# Altium PCB QI9-2604-A01_.PcbDoc (part 2 of 2)
Units mm, origin at the board's own origin, x right, y up, seen from the top; angles counter-clockwise.
Board outline 152.4 x 101.6 mm, 2 copper layers (Top Layer, Bottom Layer); 241 components, 189 nets, 865 pads, 74 vias.
Unrouted connection lines stored in the file: 153.
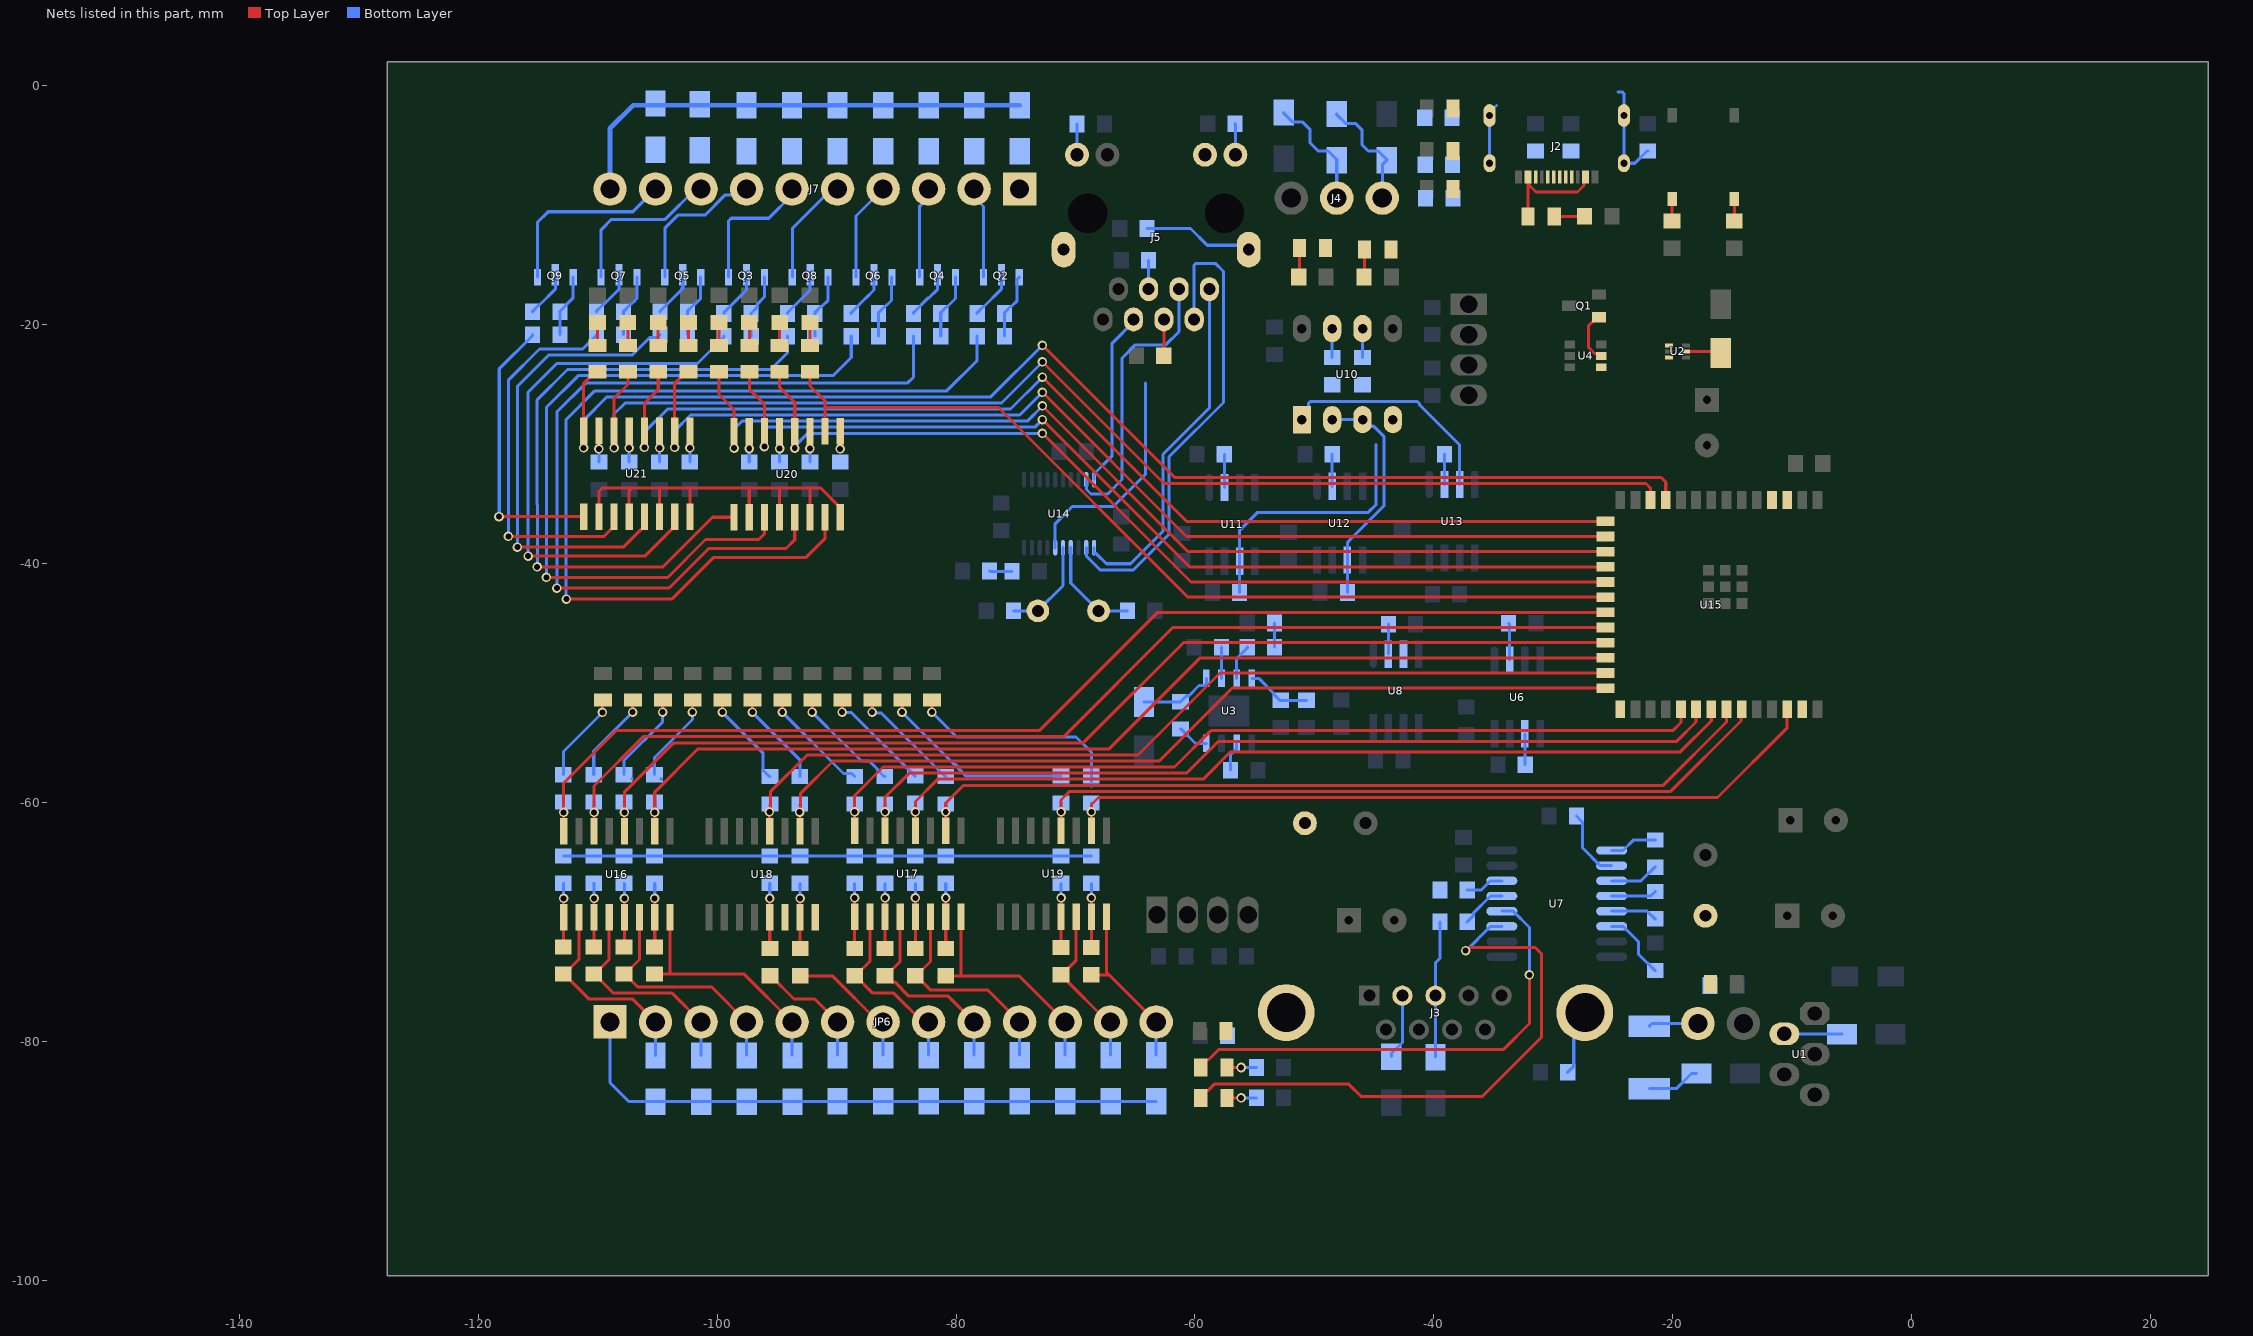
[diagram p2: the nets of this part, all layers, seen from the top]

## Via types
v1: diameter 0.8, hole 0.5, Top Layer to Bottom Layer, 74 vias

## Nets (pads, with @x,y where several pads share a name; then routed paths per layer and width w, separated by ;. In a path a pad name is that pad's centre, name@x,y a point inside that pad or via, vN(x,y) a via of type N, cw(c..) or ccw(c..) an arc to the next point about the centre after c; other vN are vias at no path point) (continued)
ICOM: D23.1 D24.1 D25.1 D26.1 D29.1 D30.1 D33.1 D34.1 D37.1 D38.1 D39.1 D40.1 JP6.1 RN1-1.2 RN1-2.2 RN1-3.2 RN1-4.2 RN1-5.2 RN1-6.2 RN2-1.2 RN2-2.2 RN2-3.2 RN2-4.2 RN2-5.2 RN2-6.2 | length 95.7
  Bottom Layer w0.254: RN1-1.2@-112.866,-64.464 RN1-2.2@-110.326,-64.464 RN1-3.2@-107.786,-64.464 RN1-4.2@-105.246,-64.464 RN1-5.2@-95.594,-64.464 RN1-6.2@-93.054,-64.464 RN2-1.2@-88.482,-64.464 RN2-2.2@-85.942,-64.464 RN2-3.2@-83.402,-64.464 -80.989,-64.464 RN2-5.2@-71.21,-64.464 RN2-6.2@-68.67,-64.464 ; JP6.1@-108.966,-78.359 -108.966,-83.439 -107.379,-85.026 D23.1@-105.156,-85.026 D25.1@-101.334,-85.026 D29.1@-97.513,-85.026 D33.1@-93.691,-85.026 -63.271,-85.026 D40.1@-63.246,-85.001
IN_00: R40.2 U15.21 U16.16 | length 98
  Top Layer w0.254: U16.16@-112.841,-62.388 v1(-112.841,-60.81) -112.841,-58.358 -108.458,-53.975 -73.025,-53.975 -63.119,-44.069 U15.21@-25.654,-44.069
  Bottom Layer w0.254: R40.2@-112.866,-59.949 -112.841,-59.974 v1(-112.841,-60.81)
IN_01: R42.2 U15.22 U16.14 | length 94.8
  Top Layer w0.254: U16.14@-110.301,-62.388 -110.301,-58.612 -106.172,-54.483 -70.993,-54.483 -61.849,-45.339 U15.22@-25.654,-45.339
  Bottom Layer w0.254: R42.2@-110.326,-59.949 -110.301,-59.974 v1(-110.301,-60.81)
IN_02: R44.2 U15.23 U16.12 | length 91.4
  Top Layer w0.254: U16.12@-107.761,-62.388 v1(-107.761,-60.81) -107.761,-59.12 -103.632,-54.991 -69.342,-54.991 -60.96,-46.609 U15.23@-25.654,-46.609
  Bottom Layer w0.254: R44.2@-107.786,-59.949 -107.761,-59.974 v1(-107.761,-60.81)
IN_03: R46.2 U15.24 U16.10 | length 88.4
  Top Layer w0.254: U16.10@-105.221,-62.388 v1(-105.221,-60.81) -105.221,-59.12 -101.6,-55.499 -67.183,-55.499 -59.563,-47.879 U15.24@-25.654,-47.879
  Bottom Layer w0.254: R46.2@-105.246,-59.949 -105.221,-59.974 v1(-105.221,-60.81)
IN_04: R48.2 U15.25 U18.12 | length 78
  Top Layer w0.254: U18.12@-95.594,-62.388 -95.594,-61.988 -95.608,-61.975 -95.608,-60.784 v1(-95.621,-60.77) -95.548,-60.697 -95.548,-59.099 -92.456,-56.007 -64.77,-56.007 -57.912,-49.149 U15.25@-25.654,-49.149
  Bottom Layer w0.254: v1(-95.621,-60.77) -95.569,-60.719 R48.2@-95.569,-60.106
IN_05: R50.2 U15.26 U18.10 | length 74.9
  Top Layer w0.254: U18.10@-93.054,-62.388 -93.054,-61.988 -93.072,-61.971 -93.072,-60.81 v1(-93.09,-60.793) -93.008,-60.711 -93.008,-59.226 -90.297,-56.515 -62.992,-56.515 -56.896,-50.419 U15.26@-25.654,-50.419
  Bottom Layer w0.254: v1(-93.09,-60.793) -93.08,-60.783 R50.2@-93.08,-60.106
IN_06: R41.2 U15.31 U17.16 | length 76.4
  Top Layer w0.254: U17.16@-88.482,-62.344 v1(-88.482,-60.766) -88.482,-59.399 -86.106,-57.023 -61.722,-57.023 -58.674,-53.975 -20.012,-53.975 -19.324,-53.287 U15.31@-19.324,-52.184
  Bottom Layer w0.254: v1(-88.482,-60.766) R41.2@-88.482,-60.106
IN_07: R43.2 U15.32 U17.14 | length 75
  Top Layer w0.254: U17.14@-85.942,-62.344 v1(-85.942,-60.766) -85.942,-59.556 -83.918,-57.531 -60.706,-57.531 -58.039,-54.864 -19.671,-54.864 -18.054,-53.247 U15.32@-18.054,-52.184
  Bottom Layer w0.254: R43.2@-85.968,-60.106 -85.942,-60.132 v1(-85.942,-60.766)
IN_08: R45.2 U15.33 U17.12 | length 73.6
  Top Layer w0.254: U17.12@-83.402,-62.344 v1(-83.402,-60.766) -83.402,-59.907 -81.534,-58.039 -59.309,-58.039 -57.023,-55.753 -19.372,-55.753 -16.785,-53.166 -16.785,-52.185 U15.33@-16.784,-52.184
  Bottom Layer w0.254: v1(-83.402,-60.766) R45.2@-83.402,-60.042
IN_09: R47.2 U15.34 U17.10 | length 72.2
  Top Layer w0.254: U17.10@-80.862,-62.344 v1(-80.862,-60.766) -80.862,-60.034 -79.375,-58.547 -20.814,-58.547 -15.514,-53.247 U15.34@-15.514,-52.184
  Bottom Layer w0.254: v1(-80.862,-60.766) R47.2@-80.862,-60.106
IN_10: R49.2 U15.35 U19.12 | length 63.9
  Top Layer w0.254: U19.12@-71.21,-62.344 v1(-71.21,-60.766) -71.21,-59.78 -70.485,-59.055 -20.187,-59.055 -14.297,-53.166 -14.297,-52.237 U15.35@-14.244,-52.184
  Bottom Layer w0.254: v1(-71.21,-60.766) R49.2@-71.21,-60.042
IN_11: R51.2 U15.38 U19.10 | length 65.4
  Top Layer w0.254: U19.10@-68.67,-62.344 v1(-68.67,-60.766) -68.67,-60.161 -68.072,-59.563 -16.256,-59.563 -10.434,-53.741 U15.38@-10.434,-52.184
  Bottom Layer w0.254: v1(-68.67,-60.766) R51.2@-68.67,-60.042
INPUT00: D23.2 JP6.2 RN3-1.1 U16.2 | length 17.5
  Top Layer w0.254: RN3-1.1@-112.866,-74.358 RN3-1.1@-112.803,-74.358 ; U16.2@-111.571,-69.588 -111.571,-73.126 RN3-1.1@-112.803,-74.358 ; JP6.2@-105.156,-78.359 -107.061,-76.454 -110.707,-76.454 RN3-1.1@-112.803,-74.358
  Bottom Layer w0.254: D23.2@-105.156,-81.166 JP6.2@-105.156,-78.359
INPUT01: D25.2 JP6.3 RN3-2.1 U16.4 | length 18.6
  Top Layer w0.254: U16.4@-109.031,-69.588 -109.031,-73.126 -110.263,-74.358 -108.675,-75.946 -103.759,-75.946 JP6.3@-101.346,-78.359
  Bottom Layer w0.254: D25.2@-101.346,-81.154 JP6.3@-101.346,-78.359
INPUT02: D29.2 JP6.4 RN3-3.1 U16.6 U18.6 | length 19.9
  Top Layer w0.254: U16.6@-106.491,-69.588 -106.491,-73.126 -107.723,-74.358 -106.856,-75.225 -106.853,-75.225 -106.64,-75.438 -100.457,-75.438 JP6.4@-97.536,-78.359
  Bottom Layer w0.254: D29.2@-97.536,-81.143 JP6.4@-97.536,-78.359
INPUT03: D33.2 JP6.5 RN3-4.1 U16.8 U18.8 | length 20.8
  Top Layer w0.254: RN3-4.1@-105.246,-74.358 -104.076,-74.358 ; U16.8@-103.951,-69.588 -103.951,-74.233 -104.076,-74.358 ; JP6.5@-93.726,-78.359 -97.727,-74.358 -103.951,-74.358 -104.076,-74.358
  Bottom Layer w0.254: D33.2@-93.726,-81.131 JP6.5@-93.726,-78.359
INPUT04: D37.2 JP6.6 RN3-5.1 | length 10
  Top Layer w0.254: RN3-5.1@-95.569,-74.497 -95.506,-74.497 -93.564,-76.439 -91.836,-76.439 JP6.6@-89.916,-78.359
  Bottom Layer w0.254: D37.2@-89.916,-81.14 JP6.6@-89.916,-78.359
INPUT05: D39.2 JP6.7 RN3-6.1 | length 11.3
  Top Layer w0.254: RN3-6.1@-93.029,-74.497 -90.355,-74.497 -86.493,-78.359 JP6.7@-86.106,-78.359
  Bottom Layer w0.254: D39.2@-86.106,-81.14 JP6.7@-86.106,-78.359
INPUT06: D24.2 JP6.8 RN4-1.1 U17.2 | length 16
  Top Layer w0.254: RN4-1.1@-88.482,-74.497 RN4-1.1@-88.419,-74.497 ; U17.2@-87.212,-69.544 -87.212,-73.291 RN4-1.1@-88.419,-74.497 ; JP6.8@-82.296,-78.359 -82.799,-78.359 -85.212,-75.946 -86.97,-75.946 RN4-1.1@-88.419,-74.497
  Bottom Layer w0.254: D24.2@-82.296,-81.14 JP6.8@-82.296,-78.359
INPUT07: D26.2 JP6.9 RN4-2.1 U17.4 | length 17.4
  Top Layer w0.254: U17.4@-84.672,-69.544 -84.672,-73.291 -85.879,-74.497 RN4-2.1@-85.942,-74.497 -85.434,-75.005 -85.142,-75.005 -83.947,-76.2 -80.645,-76.2 JP6.9@-78.486,-78.359
  Bottom Layer w0.254: D26.2@-78.486,-81.14 JP6.9@-78.486,-78.359
INPUT08: D30.2 JP6.10 RN4-3.1 U17.6 | length 18.6
  Top Layer w0.254: RN4-3.1@-83.402,-74.497 RN4-3.1@-83.339,-74.497 ; U17.6@-82.132,-69.544 -82.132,-73.291 RN4-3.1@-83.339,-74.497 ; JP6.10@-74.676,-78.359 -77.365,-75.67 -82.166,-75.67 RN4-3.1@-83.339,-74.497
  Bottom Layer w0.254: D30.2@-74.676,-81.14 JP6.10@-74.676,-78.359
INPUT09: D34.2 JP6.11 RN4-4.1 U17.8 | length 19.3
  Top Layer w0.254: RN4-4.1@-80.799,-74.497 -79.629,-74.497 ; U17.8@-79.592,-69.544 -79.592,-74.461 -79.629,-74.497 ; JP6.11@-70.866,-78.359 -74.728,-74.497 -79.629,-74.497
  Bottom Layer w0.254: D34.2@-70.866,-81.14 JP6.11@-70.866,-78.359
INPUT10: D38.2 JP6.12 RN4-5.1 U19.6 | length 13.9
  Top Layer w0.254: RN4-5.1@-71.21,-74.411 -71.147,-74.411 -69.94,-73.205 U19.6@-69.94,-69.544 ; RN4-5.1@-71.147,-74.497 JP6.12@-67.285,-78.359
  Bottom Layer w0.254: JP6.12@-67.285,-78.359 JP6.12@-67.056,-78.359 D38.2@-67.056,-81.14
INPUT11: D40.2 JP6.13 RN4-6.1 U19.8 | length 14.8
  Top Layer w0.254: RN4-6.1@-68.67,-74.411 -67.194,-74.411 ; U19.8@-67.4,-69.544 -67.4,-74.205 -67.194,-74.411 ; JP6.13@-63.246,-78.359 -67.194,-74.411
  Bottom Layer w0.254: D40.2@-63.246,-81.14 JP6.13@-63.246,-78.359
LINK/RESET: J5.10 U14.6 | length 18.9
  Bottom Layer w0.254: U14.6@-71.699,-38.664 -71.699,-36.647 -70.263,-35.211 -66.834,-35.211 -64.135,-32.512 -64.135,-24.892
NetC3_1: C3.1 U3.8 | length 2.7
  Bottom Layer w0.254: C3.1@-61.214,-53.848 -61.151,-53.848 -59.95,-55.048 U3.8@-59.055,-55.048
NetC3_2: C3.2 D9.2 L2.1 U3.1 | length 6.3
  Bottom Layer w0.254: D9.2@-64.262,-51.562 C3.2@-61.214,-51.562 -60.706,-51.054 -60.509,-51.054 -59.658,-50.203 -59.207,-50.203 -59.055,-50.051 U3.1@-59.055,-49.6
NetC5_1: C5.1 U3.3 | length 3
  Bottom Layer w0.254: U3.3@-56.515,-49.6 -56.515,-47.942 -55.626,-47.053 C5.1@-55.626,-46.99
NetC5_2: C5.2 R11.2 | length 2
  Bottom Layer w0.254: C5.2@-53.34,-46.99 R11.2@-53.34,-44.958
NetC7_2: C7.2 J2.SH1 J2.SH2 J2.SH3 J2.SH4 | length 13.9
  Bottom Layer w0.254: J2.SH2@-35.338,-6.481 J2.SH4@-35.338,-2.481 -35.338,-2.233 -34.756,-1.651 ; -24.608,-0.508 -24.247,-0.508 -24.098,-0.657 J2.SH3@-24.098,-2.481 J2.SH1@-24.098,-6.481 -23.182,-6.481 -22.162,-5.461 C7.2@-22.098,-5.461
NetC11_1: C11.1 J3.10 J3.11 | length 5.6
  Bottom Layer w0.254: C11.1@-28.803,-82.572 -28.295,-82.064 -28.295,-79.717 -27.371,-78.793 J3.10@-27.371,-77.574
NetC12_1: C12.1 U7.3 | length 4.1
  Bottom Layer w0.254: U7.3@-25.118,-66.548 -22.669,-66.548 -21.526,-65.405 C12.1@-21.463,-65.405
NetC12_2: C12.2 U7.1 | length 4
  Bottom Layer w0.254: U7.1@-25.118,-64.008 -24.168,-64.008 -23.279,-63.119 C12.2@-21.463,-63.119
NetC13_1: C13.1 U7.4 | length 3.8
  Bottom Layer w0.254: U7.4@-25.118,-67.818 -21.844,-67.818 C13.1@-21.463,-67.437
NetC13_2: C13.2 U7.5 | length 3.9
  Bottom Layer w0.254: U7.5@-25.118,-69.088 -22.162,-69.088 -21.526,-69.723 C13.2@-21.463,-69.723
NetC15_1: C15.1 U7.2 | length 5.9
  Bottom Layer w0.254: C15.1@-28.07,-61.124 -27.562,-61.632 -27.562,-63.784 -26.068,-65.278 U7.2@-25.118,-65.278
NetC16_2: C16.2 U7.6 | length 5.8
  Bottom Layer w0.254: U7.6@-25.118,-70.358 -24.168,-70.358 -22.86,-71.666 -22.86,-72.707 -21.526,-74.041 C16.2@-21.463,-74.041
NetC26_2: C26.2 R32.2 | length 1.9
  Bottom Layer w0.254: C26.2@-77.186,-40.619 -77.165,-40.64 R32.2@-75.311,-40.64
NetC27_2: C27.2 J5.4 | length 3.1
  Top Layer w0.254: C27.2@-62.611,-22.606 -62.606,-22.601 J5.4@-62.606,-19.558
NetC28_2: C28.2 J5.5 | length 2.4
  Bottom Layer w0.254: C28.2@-63.881,-14.605 -63.876,-14.61 J5.5@-63.876,-17.018
NetC30_2: C30.2 J5.13 J5.14 | length 9.2
  Bottom Layer w0.254: C30.2@-64.008,-11.938 -60.377,-11.938 -58.97,-13.345 -55.874,-13.345 J5.13@-55.501,-13.718
NetD1_1: D1.1 F1.2 | length 4.5
  Bottom Layer w0.254: F1.2@-21.971,-83.947 -19.704,-83.947 -18.434,-82.677 D1.1@-18.034,-82.677
NetD2_2: D2.2 R1.2
NetD3_2: D3.2 R2.2
NetD4_2: D4.2 R3.2 | length 2.7
  Top Layer w0.254: D4.2@-30.058,-10.922 R3.2@-27.391,-10.922
NetD6_2: D6.2 L1.1 U1.2 | length 4.8
  Bottom Layer w0.254: U1.2@-10.668,-79.355 -5.862,-79.355 D6.2@-5.842,-79.375
NetD8_2: D8.2 R7.2
NetD10_1: D10.1 R14.1 | length 2.5
  Top Layer w0.254: D10.1@-57.32,-82.169 v1(-56.134,-82.169)
  Bottom Layer w0.254: v1(-56.134,-82.169) R14.1@-54.864,-82.169
NetD11_1: D11.1 R15.1 | length 2.5
  Top Layer w0.254: D11.1@-57.32,-84.709 v1(-56.134,-84.709)
  Bottom Layer w0.254: v1(-56.134,-84.709) R15.1@-54.864,-84.709
NetD12_1: D12.1 J3.2 R18.1 | length 5.5
  Bottom Layer w0.254: D12.1@-43.561,-81.255 -43.561,-81.001 -42.636,-80.076 J3.2@-42.636,-76.154
NetD13_1: D13.1 J3.3 R19.1 | length 11.5
  Bottom Layer w0.254: D13.1@-39.866,-81.299 -39.866,-73.404 -39.497,-73.035 R19.1@-39.497,-69.977
NetD14_1: D14.1 R22.1 | length 2.4
  Top Layer w0.254: R22.1@-51.308,-16.002 -51.265,-15.959 D14.1@-51.265,-13.589
NetD15_1: D15.1 R23.1 | length 2.3
  Top Layer w0.254: R23.1@-45.847,-16.002 -45.804,-15.959 D15.1@-45.804,-13.716
NetD16_2: D16.2 D17.1 J4.1 R24.1 | length 9.9
  Bottom Layer w0.254: D17.1@-48.133,-2.362 -48.133,-2.413 -47.409,-3.137 -46.578,-3.137 -46.038,-3.678 -46.038,-4.908 -45.497,-5.448 -44.666,-5.448 -43.942,-6.172 D16.2@-43.942,-6.223 -44.323,-6.604 J4.1@-44.323,-9.398
NetD17_2: D17.2 D18.1 J4.2 R25.1 | length 10
  Bottom Layer w0.254: D18.1@-52.578,-2.235 -52.578,-2.286 -51.854,-3.01 -51.023,-3.01 -50.356,-3.678 -50.356,-4.781 -49.688,-5.448 -48.857,-5.448 -48.133,-6.172 D17.2@-48.133,-6.223 J4.2@-48.133,-9.398
NetD19_2: D19.2 R38.1
NetD20_2: D20.2 R39.1
NetD21_2: D21.2 R40.1 | length 7.6
  Top Layer w0.254: v1(-109.601,-52.451) -109.601,-51.438 D21.2@-109.557,-51.395
  Bottom Layer w0.254: R40.1@-112.866,-57.663 -112.866,-55.716 v1(-109.601,-52.451)
NetD22_2: D22.2 R41.1 | length 9.3
  Top Layer w0.254: v1(-94.547,-52.429) -94.547,-51.416 D22.2@-94.525,-51.395
  Bottom Layer w0.254: v1(-94.547,-52.429) -89.413,-57.563 -88.74,-57.563 R41.1@-88.482,-57.82
NetD27_2: D27.2 R42.1 | length 8.6
  Top Layer w0.254: v1(-107.074,-52.429) D27.2@-107.074,-51.416 ; v1@-107.052,-52.429 D27.2@-107.052,-51.395
  Bottom Layer w0.254: R42.1@-110.326,-57.663 -110.326,-55.682 v1(-107.074,-52.429)
NetD28_2: D28.2 R43.1 | length 10.4
  Top Layer w0.254: v1(-92.042,-52.429) D28.2@-92.042,-51.416 ; v1@-92.02,-52.429 D28.2@-92.02,-51.395
  Bottom Layer w0.254: v1(-92.042,-52.429) -89.511,-54.96 -89.471,-54.96 -87.916,-56.515 -87.273,-56.515 -86.539,-57.249 -86.539,-57.312 -86.031,-57.82 R43.1@-85.968,-57.82
NetD31_2: D31.2 R46.1 | length 8.7
  Top Layer w0.254: v1(-102.063,-52.429) D31.2@-102.063,-51.416 ; v1@-102.041,-52.429 D31.2@-102.041,-51.395
  Bottom Layer w0.254: R46.1@-105.246,-57.663 -105.246,-56.224 -102.063,-53.041 v1(-102.063,-52.429) ; R46.1@-104.675,-58.044 R46.1@-104.675,-57.98
NetD32_2: D32.2 R45.1 | length 10.4
  Top Layer w0.254: v1(-89.536,-52.429) D32.2@-89.536,-51.416 ; v1@-89.514,-52.429 D32.2@-89.514,-51.395
  Bottom Layer w0.254: v1(-89.536,-52.429) -89.499,-52.466 -88.755,-52.466 -83.466,-57.756 R45.1@-83.402,-57.756
NetD35_2: D35.2 R44.1 | length 8.7
  Top Layer w0.254: v1(-104.568,-52.429) D35.2@-104.568,-51.416 ; v1@-104.547,-52.429 D35.2@-104.547,-51.395
  Bottom Layer w0.254: R44.1@-107.786,-57.663 -107.786,-56.478 -104.568,-53.26 v1(-104.568,-52.429) ; R44.1@-107.124,-58.039 R44.1@-107.124,-57.975
NetD36_2: D36.2 R47.1 | length 10.5
  Top Layer w0.254: v1(-87.031,-52.429) D36.2@-87.031,-51.416 ; v1@-87.009,-52.481 D36.2@-87.009,-51.395
  Bottom Layer w0.254: v1(-87.031,-52.429) -86.964,-52.497 -86.25,-52.497 -80.926,-57.82 R47.1@-80.862,-57.82
NetD41_2: D41.2 R48.1 | length 9.1
  Top Layer w0.254: v1(-99.558,-52.429) D41.2@-99.558,-51.416 ; v1@-99.536,-52.429 D41.2@-99.536,-51.395
  Bottom Layer w0.254: v1@-99.558,-52.441 -96.141,-55.858 -96.141,-57.312 -95.633,-57.82 R48.1@-95.569,-57.82
NetD42_2: D42.2 R49.1 | length 17.7
  Top Layer w0.254: v1(-84.526,-52.429) D42.2@-84.526,-51.416 ; v1@-84.504,-52.429 D42.2@-84.504,-51.395
  Bottom Layer w0.254: v1(-84.526,-52.429) -80.15,-56.804 -80.006,-56.804 -79.783,-57.028 -79.783,-57.172 -79.17,-57.785 R49.1@-71.21,-57.785
NetD43_2: D43.2 R50.1 | length 8.1
  Top Layer w0.254: v1(-97.052,-52.429) -97.052,-51.416 D43.2@-97.031,-51.395
  Bottom Layer w0.254: v1(-97.052,-52.429) -93.08,-56.402 R50.1@-93.08,-57.82
NetD44_2: D44.2 R51.1 | length 19.6
  Top Layer w0.254: v1(-82.02,-52.429) D44.2@-82.02,-51.416 ; v1@-81.998,-52.429 D44.2@-81.998,-51.395
  Bottom Layer w0.254: v1(-82.02,-52.429) -79.942,-54.507 -69.953,-54.507 -68.67,-55.79 R51.1@-68.67,-57.756 -68.67,-58.645
NetD45_1: D45.1 RN5-4.1 | length 1.9
  Top Layer w0.254: D45.1@-92.226,-21.729 -92.224,-21.727 RN5-4.1@-92.224,-19.813
NetD46_1: D46.1 RN5-3.1 | length 1.9
  Top Layer w0.254: D46.1@-94.766,-21.729 D46.1@-94.766,-21.729 RN5-3.1@-94.765,-19.813
NetD47_1: D47.1 RN5-2.1 | length 1.9
  Top Layer w0.254: D47.1@-97.306,-21.729 RN5-2.1@-97.306,-19.813
NetD50_1: D50.1 RN5-1.1 | length 1.9
  Top Layer w0.254: D50.1@-99.847,-21.729 RN5-1.1@-99.847,-19.813
NetD54_1: D54.1 RN8-4.1 | length 1.9
  Top Layer w0.254: RN8-4.1@-102.388,-19.813 -102.388,-21.728 D54.1@-102.386,-21.729
NetD56_1: D56.1 RN8-3.1 | length 1.9
  Top Layer w0.254: RN8-3.1@-104.929,-19.813 -104.929,-21.727 D56.1@-104.926,-21.729
NetD58_1: D58.1 RN8-2.1 | length 1.9
  Top Layer w0.254: RN8-2.1@-107.47,-19.813 -107.47,-21.726 D58.1@-107.466,-21.729
NetD61_1: D61.1 RN8-1.1 | length 1.9
  Top Layer w0.254: RN8-1.1@-110.011,-19.813 -110.011,-21.725 D61.1@-110.006,-21.729
NetF1_1: F1.1 J1.1 | length 4.2
  Bottom Layer w0.254: F1.1@-21.971,-78.717 -21.74,-78.486 J1.1@-17.907,-78.486
NetJ2_A5: J2.A5 R5.1
NetJ2_B5: J2.B5 R4.1
NetJ5_9: J5.9 R35.1 | length 2.6
  Bottom Layer w0.254: R35.1@-56.642,-3.175 -56.621,-3.196 J5.9@-56.621,-5.768
NetJ5_12: J5.12 R34.1 | length 2.6
  Bottom Layer w0.254: R34.1@-69.873,-3.2 -69.871,-3.203 J5.12@-69.871,-5.768
NetQ1_1: Q1.1 U4.5 | length 4.4
  Top Layer w0.254: Q1.1@-26.182,-19.365 -26.357,-19.365 -27.051,-20.059 -27.051,-21.903 -26.551,-22.403 -26.194,-22.403 U4.5@-25.991,-22.606
NetQ2_1: Q2.1 R52.2 R54.2 | length 5.5
  Bottom Layer w0.254: R52.2@-75.946,-20.955 -75.946,-18.986 -75.438,-18.479 -75.375,-18.479 -74.879,-17.983 -74.879,-16.187 Q2.1@-74.706,-16.014
NetQ3_1: Q3.1 R53.2 R55.2 | length 5.4
  Bottom Layer w0.254: R53.2@-97.136,-20.955 -97.155,-20.936 R55.2@-97.155,-19.05 -96.647,-18.542 -96.647,-18.288 -96.042,-17.683 Q3.1@-96.042,-16.014
NetQ4_1: Q4.1 R56.2 R58.2 | length 5.5
  Bottom Layer w0.254: R56.2@-81.28,-20.955 -81.28,-18.986 -80.772,-18.479 -80.709,-18.479 -80.04,-17.81 Q4.1@-80.04,-16.014
NetQ5_1: Q5.1 R57.2 R59.2 | length 5.3
  Bottom Layer w0.254: R57.2@-102.489,-20.828 -102.489,-18.86 -101.981,-18.351 -101.917,-18.351 -101.376,-17.81 Q5.1@-101.376,-16.014
NetQ6_1: Q6.1 R60.2 R62.2 | length 5.4
  Bottom Layer w0.254: R60.2@-86.487,-20.955 -86.487,-18.986 -85.979,-18.479 -85.916,-18.479 -85.4,-17.963 -85.4,-16.04 Q6.1@-85.374,-16.014
NetQ7_1: Q7.1 R61.2 R63.2 | length 5.3
  Bottom Layer w0.254: R61.2@-107.823,-20.828 R63.2@-107.823,-18.923 -107.823,-18.86 -107.315,-18.351 -107.252,-18.351 -106.71,-17.81 Q7.1@-106.71,-16.014
NetQ8_1: Q8.1 R64.2 R66.2 | length 5.4
  Bottom Layer w0.254: R64.2@-91.821,-20.955 -91.821,-18.986 -91.313,-18.479 -91.25,-18.479 -90.708,-17.937 Q8.1@-90.708,-16.014
NetQ9_1: Q9.1 R65.2 R67.2 | length 5.3
  Bottom Layer w0.254: R65.2@-113.157,-20.828 R67.2@-113.157,-18.923 -113.157,-18.86 -112.044,-17.747 Q9.1@-112.044,-16.014
NetR6_1: R6.1 U3.2 | length 2.6
  Bottom Layer w0.254: U3.2@-57.785,-49.6 R6.1@-57.785,-46.99
NetR7_1: R7.1 U4.4
NetR10_1: R10.1 U3.6 | length 2.4
  Bottom Layer w0.254: R10.1@-57.023,-57.277 -57.023,-56.007 -56.515,-55.499 U3.6@-56.515,-55.048
NetR12_1: R12.1 R13.2 U3.4 | length 5.4
  Bottom Layer w0.254: U3.4@-55.245,-49.6 -54.667,-49.6 -53.404,-50.863 -53.404,-50.927 -52.896,-51.435 R13.2@-52.832,-51.435 R12.1@-50.673,-51.435
NetR17_1: R17.1 U6.2 | length 3.1
  Bottom Layer w0.254: R17.1@-33.747,-44.997 -33.656,-45.089 U6.2@-33.656,-48.079
NetR18_2: R18.2 U7.14 | length 3.2
  Bottom Layer w0.254: R18.2@-37.211,-67.31 -36.03,-67.31 -35.268,-66.548 U7.14@-34.318,-66.548
NetR19_2: R19.2 U7.13 | length 3.9
  Bottom Layer w0.254: R19.2@-37.211,-69.977 -36.703,-69.469 -36.703,-69.253 -35.268,-67.818 U7.13@-34.318,-67.818
NetR21_2: R21.2 U8.2 | length 2.5
  Bottom Layer w0.254: U8.2@-43.815,-47.571 R21.2@-43.815,-45.064
NetR24_2: R24.2 U10.7 | length 2.4
  Bottom Layer w0.254: R24.2@-48.514,-22.733 U10.7@-48.514,-20.32
NetR25_2: R25.2 U10.6 | length 2.4
  Bottom Layer w0.254: R25.2@-45.974,-22.733 U10.6@-45.974,-20.32
NetR29_1: R29.1 U11.2 | length 2.8
  Bottom Layer w0.254: R29.1@-57.547,-30.849 -57.531,-30.865 U11.2@-57.531,-33.621
NetR30_1: R30.1 U12.2 | length 2.7
  Bottom Layer w0.254: U12.2@-48.514,-33.525 R30.1@-48.514,-30.836
NetR31_2: R31.2 U13.2 | length 2.5
  Bottom Layer w0.254: U13.2@-39.116,-33.367 -39.116,-30.844 R31.2@-39.107,-30.836
NetR36_1: R36.1 SW1.2 U15.27 | length 1.7
  Top Layer w0.254: R36.1@-20.066,-11.176 SW1.2@-20.066,-9.469
NetR37_1: R37.1 SW2.1 U15.3 | length 1.8
  Top Layer w0.254: R37.1@-14.859,-11.303 SW2.1@-14.859,-9.469
NetR38_2: R38.2 U15.4
NetR39_2: R39.2 U15.39
NetR52_1: R52.1 U20.15 | length 79.1
  Top Layer w0.254: v1(-112.625,-42.971) -103.804,-42.971 -100.33,-39.497 -92.583,-39.497 -90.96,-37.874 U20.15@-90.96,-36.112
  Bottom Layer w0.254: v1(-112.625,-42.971) -112.633,-42.964 -112.633,-27.924 -110.236,-25.527 -80.772,-25.527 -78.232,-22.987 R52.1@-78.232,-20.955
NetR53_1: R53.1 U21.15 | length 46.2
  Top Layer w0.254: v1(-115.824,-39.37) -106.054,-39.37 -103.548,-36.864 U21.15@-103.548,-36.064
  Bottom Layer w0.254: v1(-115.824,-39.37) -115.824,-25.654 -113.411,-23.241 -101.645,-23.241 -99.422,-21.019 R53.1@-99.422,-20.955
NetR56_1: R56.1 U20.13 | length 72.7
  Top Layer w0.254: v1(-113.414,-42.037) -104.013,-42.037 -100.711,-38.735 -94.234,-38.735 -93.5,-38.001 U20.13@-93.5,-36.112
  Bottom Layer w0.254: v1(-113.414,-42.037) -113.411,-42.034 -113.411,-27.305 -110.998,-24.892 -84.074,-24.892 -83.566,-24.384 R56.1@-83.566,-20.955
NetR57_1: R57.1 U21.13 | length 39.3
  Top Layer w0.254: v1(-116.713,-38.608) -116.694,-38.589 -107.813,-38.589 -106.088,-36.864 U21.13@-106.088,-36.064
  Bottom Layer w0.254: v1(-116.713,-38.608) -116.694,-38.589 -116.694,-25.127 -114.109,-22.543 -107.124,-22.543 -105.642,-21.06 -105.007,-21.06 R57.1@-104.775,-20.828
NetR60_1: R60.1 U20.11 | length 64.4
  Top Layer w0.254: v1(-114.3,-41.148) -104.14,-41.148 -100.965,-37.973 -96.52,-37.973 -96.04,-37.493 U20.11@-96.04,-36.112
  Bottom Layer w0.254: v1(-114.3,-41.148) -114.281,-41.129 -114.281,-34.055 -114.3,-34.036 -114.3,-26.924 -111.633,-24.257 -90.297,-24.257 -88.773,-22.733 R60.1@-88.773,-20.955
NetR61_1: R61.1 U21.11 | length 32.1
  Top Layer w0.254: v1(-117.475,-37.719) -109.483,-37.719 -108.628,-36.864 U21.11@-108.628,-36.064
  Bottom Layer w0.254: v1(-117.475,-37.719) -117.475,-24.638 -114.871,-22.034 -111.252,-22.034 -110.109,-20.892 R61.1@-110.109,-20.828
NetR64_1: R64.1 U20.9 | length 56.2
  Top Layer w0.254: v1(-115.062,-40.259) -104.534,-40.259 -100.387,-36.112 U20.9@-98.58,-36.112
  Bottom Layer w0.254: v1(-115.062,-40.259) -115.043,-40.24 -115.043,-35.071 -115.062,-35.052 -115.062,-26.289 -112.522,-23.749 -95.504,-23.749 -94.107,-22.352 R64.1@-94.107,-20.955
NetR65_1: R65.1 U21.9 | length 23.5
  Top Layer w0.254: v1(-118.256,-36.068) -115.189,-36.068 -115.185,-36.064 U21.9@-111.168,-36.064
  Bottom Layer w0.254: v1(-118.256,-36.068) -118.237,-36.049 -118.237,-23.685 -115.443,-20.892 R65.1@-115.443,-20.828
NetRN1-1_1: RN1-1.1 RN3-1.2 U16.1 | length 5.3
  Top Layer w0.254: RN3-1.2@-112.866,-72.072 -112.841,-72.046 U16.1@-112.841,-69.588 v1(-112.841,-68.01)
  Bottom Layer w0.254: RN1-1.1@-112.866,-66.75 -112.841,-66.776 v1(-112.841,-68.01)
NetRN1-2_1: RN1-2.1 RN3-2.2 U16.3 | length 5.3
  Top Layer w0.254: RN3-2.2@-110.326,-72.072 -110.301,-72.046 U16.3@-110.301,-69.588 v1(-110.301,-68.01)
  Bottom Layer w0.254: RN1-2.1@-110.326,-66.75 -110.301,-66.776 v1(-110.301,-68.01)
NetRN1-3_1: RN1-3.1 RN3-3.2 U16.5 | length 5.3
  Top Layer w0.254: RN3-3.2@-107.786,-72.072 -107.761,-72.046 U16.5@-107.761,-69.588 v1(-107.761,-68.01)
  Bottom Layer w0.254: RN1-3.1@-107.786,-66.75 -107.761,-66.776 v1(-107.761,-68.01)
NetRN1-4_1: RN1-4.1 RN3-4.2 U16.7 | length 5.3
  Top Layer w0.254: RN3-4.2@-105.246,-72.072 -105.221,-72.046 U16.7@-105.221,-69.588 v1(-105.221,-68.01)
  Bottom Layer w0.254: RN1-4.1@-105.246,-66.75 -105.221,-66.776 v1(-105.221,-68.01)
NetRN1-5_1: RN1-5.1 RN3-5.2 U18.5 | length 5.5
  Top Layer w0.254: v1(-95.594,-68.01) U18.5@-95.594,-69.588 -95.594,-72.186 RN3-5.2@-95.569,-72.211
  Bottom Layer w0.254: v1(-95.594,-68.01) RN1-5.1@-95.594,-66.75
NetRN1-6_1: RN1-6.1 RN3-6.2 U18.7 | length 5.5
  Top Layer w0.254: v1(-93.054,-68.01) U18.7@-93.054,-69.588 -93.054,-72.186 RN3-6.2@-93.029,-72.211
  Bottom Layer w0.254: v1(-93.054,-68.01) RN1-6.1@-93.054,-66.75
NetRN2-1_1: RN2-1.1 RN4-1.2 U17.1 | length 5.5
  Top Layer w0.254: RN4-1.2@-88.482,-72.211 U17.1@-88.482,-69.544 v1(-88.482,-67.966)
  Bottom Layer w0.254: v1(-88.482,-67.966) RN2-1.1@-88.482,-66.75
NetRN2-2_1: RN2-2.1 RN4-2.2 U17.3 | length 5.5
  Top Layer w0.254: RN4-2.2@-85.942,-72.211 U17.3@-85.942,-69.544 v1(-85.942,-67.966)
  Bottom Layer w0.254: v1(-85.942,-67.966) RN2-2.1@-85.942,-66.75
NetRN2-3_1: RN2-3.1 RN4-3.2 U17.5 | length 5.5
  Top Layer w0.254: RN4-3.2@-83.402,-72.211 U17.5@-83.402,-69.544 v1(-83.402,-67.966)
  Bottom Layer w0.254: v1(-83.402,-67.966) RN2-3.1@-83.402,-66.75
NetRN2-4_1: RN2-4.1 RN4-4.2 U17.7 | length 5.5
  Top Layer w0.254: U17.7@-80.872,-69.534 -80.857,-69.519 U17.7@-80.865,-69.51 ; RN4-4.2@-80.862,-72.211 U17.7@-80.862,-69.544 v1(-80.862,-67.966)
  Bottom Layer w0.254: v1(-80.862,-67.966) RN2-4.1@-80.862,-66.75
NetRN2-5_1: RN2-5.1 RN4-5.2 U19.5 | length 5.4
  Top Layer w0.254: RN4-5.2@-71.21,-72.125 U19.5@-71.21,-69.544 v1(-71.21,-67.966)
  Bottom Layer w0.254: v1(-71.21,-67.966) RN2-5.1@-71.21,-66.75
NetRN2-6_1: RN2-6.1 RN4-6.2 U19.7 | length 5.4
  Top Layer w0.254: RN4-6.2@-68.67,-72.125 U19.7@-68.67,-69.544 v1(-68.67,-67.966)
  Bottom Layer w0.254: v1(-68.67,-67.966) RN2-6.1@-68.67,-66.75
NetRN6-1_1: RN6-1.1 U20.1 | length 1.5
  Top Layer w0.254: v1(-89.706,-30.396) -89.698,-30.388 -89.698,-28.92 U20.1@-89.69,-28.912
NetRN6-2_1: RN6-2.1 U20.3 | length 2.6
  Top Layer w0.254: v1(-92.23,-30.358) U20.3@-92.23,-28.912
  Bottom Layer w0.254: RN6-2.1@-92.23,-31.496 v1(-92.23,-30.358)
NetRN6-3_1: RN6-3.1 U20.5 | length 2.6
  Top Layer w0.254: v1(-94.77,-30.358) U20.5@-94.77,-28.912
  Bottom Layer w0.254: RN6-3.1@-94.77,-31.496 v1(-94.77,-30.358)
NetRN6-4_1: RN6-4.1 U20.7 | length 2.6
  Top Layer w0.254: v1(-97.31,-30.358) U20.7@-97.31,-28.912
  Bottom Layer w0.254: RN6-4.1@-97.31,-31.496 v1(-97.31,-30.358)
NetRN7-1_1: RN7-1.1 U21.1 | length 2.6
  Top Layer w0.254: v1(-102.278,-30.31) U21.1@-102.278,-28.864
  Bottom Layer w0.254: RN7-1.1@-102.287,-31.496 -102.278,-31.487 v1(-102.278,-30.31)
NetRN7-2_1: RN7-2.1 U21.3 | length 2.6
  Top Layer w0.254: v1(-104.818,-30.31) U21.3@-104.818,-28.864
  Bottom Layer w0.254: v1(-104.818,-30.31) -104.818,-31.495 RN7-2.1@-104.816,-31.496
NetRN7-3_1: RN7-3.1 U21.5 | length 2.6
  Top Layer w0.254: v1(-107.358,-30.31) U21.5@-107.358,-28.864
  Bottom Layer w0.254: RN7-3.1@-107.36,-31.496 RN7-3.1@-107.36,-31.496 v1(-107.358,-30.31)
NetRN7-4_1: RN7-4.1 U21.7 | length 2.6
  Top Layer w0.254: v1(-109.898,-30.396) U21.7@-109.898,-28.864
  Bottom Layer w0.254: v1(-109.898,-30.396) -109.898,-31.481 RN7-4.1@-109.883,-31.496
OCOM_N: D48.2 D49.2 D51.2 D52.2 D53.2 D55.2 D57.2 D59.2 D60.2 J7.10 Q2.2 Q3.2 Q4.2 Q5.2 Q6.2 Q7.2 Q8.2 Q9.2 R54.1 R55.1 R58.1 R59.1 R62.1 R63.1 R66.1 R67.1 | length 72.2
  Bottom Layer w0.254: R67.1@-115.443,-18.923 -115.443,-18.86 -114.935,-18.351 -114.871,-18.351 -113.544,-17.024 Q9.2@-113.544,-15.814 ; R63.1@-110.109,-18.923 -110.109,-18.86 -109.601,-18.351 -109.537,-18.351 -108.21,-17.024 Q7.2@-108.21,-15.814 ; R59.1@-104.775,-18.923 -104.775,-18.86 -104.267,-18.351 -104.264,-18.351 -102.876,-16.963 Q5.2@-102.876,-15.814 ; R55.1@-99.441,-19.05 -99.441,-18.986 -98.241,-17.787 -98.234,-17.787 -97.542,-17.095 Q3.2@-97.542,-15.814 ; R66.1@-94.107,-19.05 -94.107,-18.986 -93.599,-18.479 -93.591,-18.479 -92.208,-17.095 Q8.2@-92.208,-15.814 ; R62.1@-88.773,-19.05 -88.773,-18.986 -87.573,-17.787 -87.566,-17.787 -86.874,-17.095 Q6.2@-86.874,-15.814 ; R58.1@-83.566,-19.05 -83.566,-18.986 -82.331,-17.751 -82.267,-17.751 -81.54,-17.024 Q4.2@-81.54,-15.814 ; R54.1@-78.232,-19.05 -78.232,-18.986 -77.724,-18.479 -77.661,-18.479 -76.206,-17.024 Q2.2@-76.206,-15.814
  Bottom Layer w0.4: J7.10@-108.966,-8.636 -108.966,-3.556 -107.036,-1.626 D48.2@-74.676,-1.626
OCOM_P: D48.1 J7.1 U20.10 U20.12 U20.14 U20.16 U21.10 U21.12 U21.14 U21.16 | length 38.8
  Top Layer w0.254: U21.10@-109.898,-36.064 -109.898,-33.952 -109.601,-33.655 -107.124,-33.655 ; U21.12@-107.358,-36.064 -107.358,-33.888 -107.124,-33.655 ; U21.14@-104.818,-36.064 -104.818,-33.825 -104.648,-33.655 ; U21.16@-102.278,-36.064 -102.278,-33.698 -102.235,-33.655 ; U20.10@-97.31,-36.112 -97.31,-33.683 -97.282,-33.655 ; U20.12@-94.77,-36.112 -94.77,-33.683 -94.742,-33.655 ; U20.14@-92.23,-36.112 -92.23,-33.754 -92.329,-33.655 ; U20.16@-89.69,-36.112 -89.69,-35.312 -91.347,-33.655 -92.329,-33.655 ; -107.124,-33.655 -104.648,-33.655 ; -104.648,-33.655 -102.235,-33.655 ; -102.235,-33.655 -97.282,-33.655 ; -97.282,-33.655 -94.742,-33.655 ; -94.742,-33.655 -92.329,-33.655
OUT_00: D45.2 U15.20 U20.2 | length 77.4
  Top Layer w0.254: D45.2@-92.226,-23.929 -92.226,-25.122 -90.96,-26.388 -90.96,-26.924 ; U20.2@-90.96,-28.912 -90.96,-26.924 ; U15.20@-25.654,-42.799 -60.579,-42.799 -76.454,-26.924 -90.96,-26.924
OUT_01: D46.2 U15.19 U20.4 | length 80.5
  Top Layer w0.254: D46.2@-94.766,-23.929 -94.766,-25.249 -93.5,-26.515 U20.4@-93.5,-28.912 v1(-93.5,-30.325) ; v1(-72.771,-29.083) -60.325,-41.529 U15.19@-25.654,-41.529
  Bottom Layer w0.254: v1(-93.5,-30.325) -93.5,-30.177 -92.406,-29.083 v1(-72.771,-29.083)
OUT_02: D47.2 U15.18 U20.6 | length 84
  Top Layer w0.254: D47.2@-97.306,-23.929 -97.306,-25.388 -96.04,-26.654 U20.6@-96.04,-28.912 v1(-96.04,-30.198) ; v1(-72.771,-27.94) -60.452,-40.259 U15.18@-25.654,-40.259
  Bottom Layer w0.254: v1(-96.04,-30.198) -96.04,-28.851 -95.764,-28.575 -73.406,-28.575 v1(-72.771,-27.94)
OUT_03: D50.2 U15.17 U20.8 | length 87.3
  Top Layer w0.254: D50.2@-99.846,-23.929 -99.846,-25.835 -98.58,-27.101 U20.8@-98.58,-28.912 v1(-98.58,-30.325) ; v1(-72.771,-26.797) -60.579,-38.989 U15.17@-25.654,-38.989
  Bottom Layer w0.254: v1(-98.58,-30.325) -98.58,-28.73 -97.917,-28.067 -74.041,-28.067 v1(-72.771,-26.797)
OUT_04: D54.2 U15.16 U21.2 | length 92.6
  Top Layer w0.254: v1(-103.548,-30.269) U21.2@-103.548,-28.864 -103.548,-24.891 -102.586,-23.929 D54.2@-102.386,-23.929 ; v1(-72.771,-25.654) -60.706,-37.719 U15.16@-25.654,-37.719
  Bottom Layer w0.254: v1(-103.548,-30.269) -103.548,-28.872 -102.235,-27.559 -74.676,-27.559 v1(-72.771,-25.654)
OUT_05: D56.2 U15.15 U21.4 | length 95.4
  Top Layer w0.254: v1(-106.088,-30.269) U21.4@-106.088,-28.864 -106.088,-26.586 -104.926,-25.424 D56.2@-104.926,-23.929 ; v1(-72.771,-24.384) -60.706,-36.449 U15.15@-25.654,-36.449
  Bottom Layer w0.254: v1(-106.088,-30.269) -106.088,-28.999 -104.14,-27.051 -75.438,-27.051 v1(-72.771,-24.384)
OUT_06: D58.2 U15.12 U21.6 | length 103.6
  Top Layer w0.254: v1(-108.628,-30.31) U21.6@-108.628,-28.864 -108.628,-26.162 -107.466,-25 D58.2@-107.466,-23.929 ; v1(-72.771,-23.114) -62.592,-33.293 -22.254,-33.293 -21.864,-33.683 U15.12@-21.864,-34.684
  Bottom Layer w0.254: v1(-108.628,-30.31) -108.628,-27.475 -107.696,-26.543 -76.2,-26.543 v1(-72.771,-23.114)
OUT_07: D61.2 U15.11 U21.8 | length 108.7
  Top Layer w0.254: v1(-111.168,-30.31) U21.8@-111.168,-28.864 -111.168,-24.891 -110.206,-23.929 D61.2@-110.006,-23.929 ; v1(-72.771,-21.717) -61.703,-32.785 -20.976,-32.785 -20.594,-33.167 U15.11@-20.594,-34.684
  Bottom Layer w0.254: v1(-111.168,-30.31) -111.168,-27.983 -109.22,-26.035 -77.089,-26.035 v1(-72.771,-21.717)
OUTPUT_00: D49.1 J7.2 Q2.3 | length 7.7
  Bottom Layer w0.254: J7.2@-78.486,-8.636 -78.486,-9.325 -77.706,-10.105 Q2.3@-77.706,-16.014
OUTPUT_01: D51.1 J7.3 Q4.3 | length 7.7
  Bottom Layer w0.254: Q4.3@-83.04,-16.014 -83.04,-10.069 -82.296,-9.325 J7.3@-82.296,-8.636
OUTPUT_02: D52.1 J7.4 Q6.3 | length 8.3
  Bottom Layer w0.254: Q6.3@-88.374,-16.014 -88.374,-10.904 J7.4@-86.106,-8.636
OUTPUT_03: D53.1 J7.5 Q8.3 | length 9.2
  Bottom Layer w0.254: Q8.3@-93.708,-16.014 -93.708,-11.938 -90.406,-8.636 J7.5@-89.916,-8.636
OUTPUT_04: D55.1 J7.6 Q3.3 | length 11.4
  Bottom Layer w0.254: Q3.3@-99.042,-16.014 -99.042,-11.321 -98.806,-11.085 -95.667,-11.085 -93.726,-9.144 J7.6@-93.726,-8.636
OUTPUT_05: D57.1 J7.7 Q5.3 | length 12.3
  Bottom Layer w0.254: Q5.3@-104.376,-16.014 -104.376,-11.92 -103.286,-10.83 -101.021,-10.83 -99.314,-9.123 -98.023,-9.123 J7.7@-97.536,-8.636
OUTPUT_06: D59.1 J7.8 Q7.3 | length 13.7
  Bottom Layer w0.254: Q7.3@-109.71,-16.014 -109.71,-12.047 -108.839,-11.176 -104.35,-11.176 -101.81,-8.636 J7.8@-101.346,-8.636
OUTPUT_07: D60.1 J7.9 Q9.3 | length 15.6
  Bottom Layer w0.254: Q9.3@-115.044,-16.014 -115.044,-11.448 -114.137,-10.541 -107.061,-10.541 J7.9@-105.156,-8.636
RXN: J5.6 U14.20 | length 14.8
  Bottom Layer w0.254: U14.20@-68.449,-32.964 -68.449,-32.489 -66.929,-30.969 -66.929,-21.541 -65.146,-19.758 J5.6@-65.146,-19.558
RXP: J5.3 U14.19 | length 23.9
  Bottom Layer w0.254: U14.19@-69.099,-32.964 -69.081,-32.982 -69.081,-33.789 -68.707,-34.163 -67.31,-34.163 -66.104,-32.956 -66.104,-22.796 -64.992,-21.685 -62.447,-21.685 -61.336,-20.574 J5.3@-61.336,-17.018
TXN: J5.2 U14.2 | length 40.6
  Bottom Layer w0.254: U14.2@-69.099,-38.664 -69.081,-38.682 -69.081,-39.377 -67.945,-40.513 -65.151,-40.513 -62.167,-37.529 -62.167,-31.051 -57.615,-26.5 -57.615,-15.537 -58.293,-14.859 -59.917,-14.859 -60.066,-15.008 J5.2@-60.066,-19.558
TXP: J5.1 U14.1 | length 29.6
  Bottom Layer w0.254: U14.1@-68.449,-38.664 -68.449,-39.113 -68.405,-39.157 -68.259,-39.157 -67.412,-40.005 -65.405,-40.005 -62.675,-37.274 -62.675,-30.841 -58.796,-26.963 J5.1@-58.796,-17.018
UART_EN1: R27.1 U10.2 U10.3 U12.6 | length 19.2
  Bottom Layer w0.254: U10.2@-48.514,-27.94 U10.3@-45.974,-27.94 -45.42,-28.494 -45.039,-28.494 -44.196,-29.337 -44.196,-35.179 -47.117,-38.1 -47.117,-38.13 -47.244,-38.257 R27.1@-47.244,-42.418
UART_RX0: D10.2 U7.12 U8.3 | length 40.1
  Top Layer w0.254: D10.2@-59.52,-82.169 -59.52,-81.969 -59.097,-81.546 -58.897,-81.546 -57.996,-80.645 -34.163,-80.645 -32.004,-78.486 v1(-32.004,-74.422)
  Bottom Layer w0.254: U7.12@-34.318,-69.088 -33.368,-69.088 -32.004,-70.452 v1(-32.004,-74.422)
UART_RX1: D14.2 U10.1 U13.3 | length 19.2
  Bottom Layer w0.254: U10.1@-51.054,-27.94 -50.493,-27.379 -50.493,-26.565 -50.345,-26.416 -41.402,-26.416 -41.212,-26.607 -41.212,-26.701 -37.846,-30.066 U13.3@-37.846,-33.367
UART_TX0: D11.2 R16.1 U6.6 U7.11 | length 51.7
  Top Layer w0.254: D11.2@-59.52,-84.709 -59.52,-84.509 -59.097,-84.086 -58.897,-84.086 -58.377,-83.566 -47.117,-83.566 -46.101,-84.582 -35.941,-84.582 -30.988,-79.629 -30.988,-72.644 -31.496,-72.136 -37.084,-72.136 v1(-37.338,-72.39)
  Bottom Layer w0.254: v1@-37.338,-72.428 -35.306,-70.396 -35.306,-70.358 U7.11@-34.318,-70.358 ; U6.6@-32.386,-54.242 -32.386,-56.795 R16.1@-32.361,-56.819
UART_TX1: D15.2 R26.1 U10.4 U11.6 | length 22.5
  Bottom Layer w0.254: R26.1@-56.261,-42.418 U11.6@-56.261,-39.785 -56.261,-37.211 -54.755,-35.705 -45.484,-35.705 -44.831,-35.052 -44.831,-30.043
USB_D+: J2.A6 J2.B6 U2.3
USB_D-: J2.A7 J2.B7 U2.1
VBUS: D4.1 D7.1 J2.A4_B9 J2.B4_A9 U2.5 | length 12.8
  Top Layer w0.254: D4.1@-32.131,-10.922 -32.118,-10.909 J2.B4_A9@-32.118,-7.631 -32.131,-7.644 -31.999,-7.776 -31.999,-8.339 -31.448,-8.89 -27.988,-8.89 -27.437,-8.339 -27.437,-7.75 J2.A4_B9@-27.318,-7.631 ; U2.5@-18.901,-22.225 -16.129,-22.225 D7.1@-16.002,-22.352
XI: C29.1 U14.4 Y1.1 | length 8.7
  Bottom Layer w0.254: U14.4@-70.399,-38.664 -70.399,-41.615 Y1.1@-68.072,-43.942 C29.1@-65.659,-43.942
XO: C31.1 U14.5 Y1.2 | length 8.2
  Bottom Layer w0.254: C31.1@-75.184,-43.942 Y1.2@-73.152,-43.942 -71.049,-41.839 U14.5@-71.049,-38.664
pads on no net: J2.A8 J2.B8 J3.1 J3.4 J3.6 J3.7 J3.8 J3.9 J5.0 J5.7 U3.EPAD U4.2 U6.1 U6.4 U7.7 U7.8 U7.9 U7.10 U8.1 U8.4 U11.1 U11.4 U12.1 U12.4 U13.1 U13.4 U14.9 U14.10 U14.12 U14.15 U14.16 U15.28 U15.29 U15.30 U18.1 U18.2 U18.3 U18.4 U18.13 U18.14 U18.15 U18.16 U19.1 U19.2 U19.3 U19.4 U19.13 U19.14 U19.15 U19.16

## Keep-outs
Keep-Out Layer:
  lines w0.254: -123,-87 0,-87 0,0 -123,0 -123,-87

## Silkscreen, mask and mechanical layers (free items; w line width, h text height)
Top Overlay:
  lines w0.254: -153,-43.5 0,-43.5 ; -123,-77 7,-77 ; -123,-10 7,-10 ; -110.5,-87.5 -110.5,0 ; -12.5,-87.5 -12.5,0

## Dimensions
-123,0 to -123,-10 on Top Overlay
0,0 to -12.5,0 on Top Overlay
-123,0 to -110.5,0 on Top Overlay
-123,0 to -123,-87 on Top Overlay
-123,0 to 0,0 on Top Overlay

## Text inside footprints (layer, text, board x,y; h text height)
U3: Bottom Overlay "*" at -59.487,-49.028 h1.27 r90; Bottom 3D Body "*" at -58.306,-50.394 h1.27 r90
U4: Top Overlay "*" at -29.191,-21.123 h1.27; Top 3D Body "*" at -28.118,-22.504 h1.27
U6: Bottom Overlay "8" at -34.621,-55.605 h0.51 r90; Bottom Overlay "1" at -34.722,-46.639 h0.51 r90
U8: Bottom Overlay "1" at -44.882,-46.131 h0.51 r90; Bottom Overlay "8" at -44.78,-55.097 h0.51 r90
U11: Bottom Overlay "8" at -58.496,-41.148 h0.51 r90; Bottom Overlay "1" at -58.598,-32.182 h0.51 r90
U12: Bottom Overlay "1" at -49.581,-32.085 h0.51 r90; Bottom Overlay "8" at -49.479,-41.052 h0.51 r90
U13: Bottom Overlay "1" at -40.183,-31.928 h0.51 r90; Bottom Overlay "8" at -40.081,-40.894 h0.51 r90
U15: Top Overlay "*" at -8.529,-32.982 h1.27 r270; Top 3D Body "*" at -8.529,-35.751 h1.27 r270